# Altium PCB turkin_ivt23_1d_PCB1.PcbDoc
Units mm, origin at the board's own origin, x right, y up, seen from the top; angles counter-clockwise.
Board outline 135.5 x 62 mm, 2 copper layers (Top Layer, Bottom Layer), stack 1.535 mm thick; 50 components, 66 nets, 239 pads, 0 vias.
Unrouted connection lines stored in the file: 158.
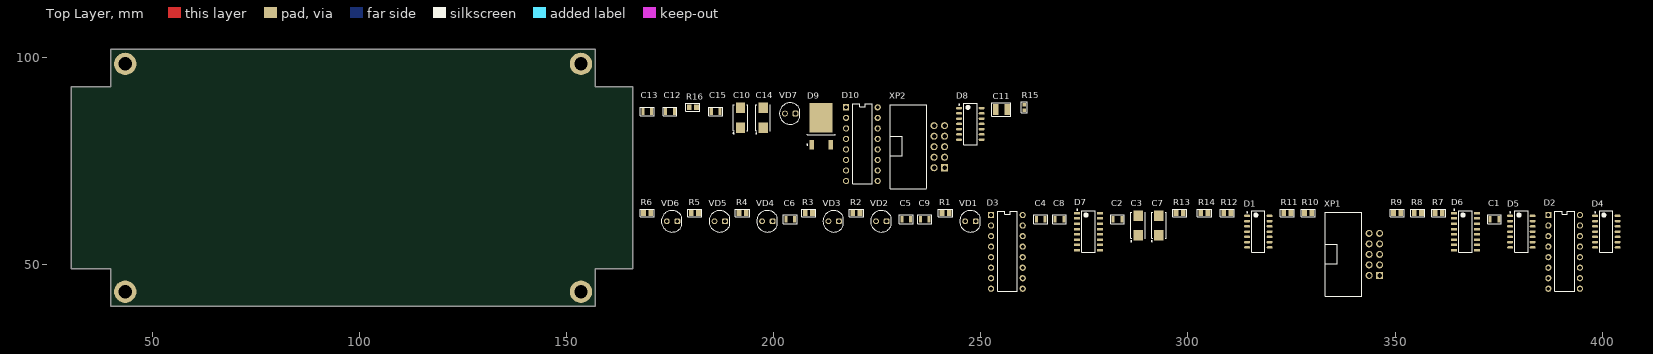
[diagram p0: Top Layer view]
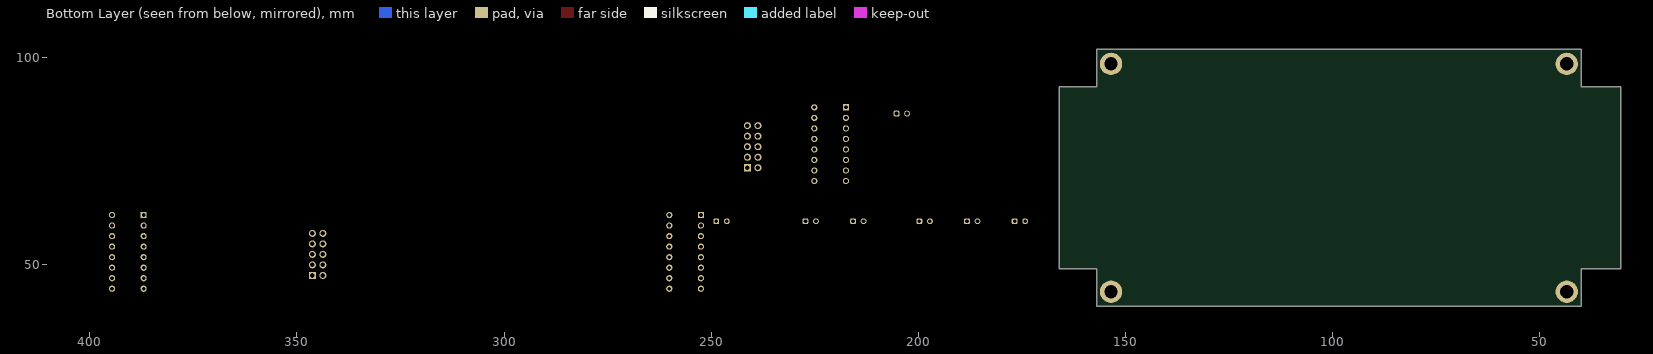
[diagram p1: Bottom Layer view, seen from below]

## Layer stack, top to bottom
Top Solder: solder mask 0.01, Solder Resist, Dk 3.5
Top Layer: signal copper 0.018
Dielectric 1: core 1.4986, Core-043, Dk 4.3
Bottom Layer: signal copper 0.018
Bottom Solder: solder mask 0.01, Solder Resist, Dk 3.5

## Board outline
30.5,49 40,49 40,40 157,40 157,49 166,49 166,93 157,93 157,102 40,102 40,93 30.5,93

## Design rules (kind name [scope] priority, off if disabled: settings)
Clearance [All] p1: gap=0.2 ignorepadtopadclearanceinfootprint=FALSE
DiffPairsRouting [All] p1: maxlimit=0.77 minlimit=0.2 mostfreqgap=0.35 toplayer_minwidth=0.2 toplayer_maxwidth=0.5 toplayer_prefwidth=0.38 bottomlayer_minwidth=0.2 bottomlayer_maxwidth=0.5 bottomlayer_prefwidth=0.38 maxuncoupledlength=12.7
HoleSize [All] p1: absolutevalues=TRUE maxlimit=4.5 minlimit=0.3 maxpercent=80.000 minpercent=20.000
PolygonConnect [All] p1: connectstyle=Relief reliefconductorwidth=0.254 reliefentries=4 polygonreliefangle="90 Angle" airgapwidth=0.254
RoutingVias [All] p1: holewidth=0.4 width=0.8 viastyle="Through Hole" minholewidth=0.3 minwidth=0.6 maxholewidth=1 maxwidth=1.5
SolderMaskExpansion [All] p1: expansion=0.102 istentingtop=FALSE
Width [All] p1: maxlimit=0.5 minlimit=0.2 preferedwidth=0.38 minimp=50.000000 maximp=50.000000 favimp=50.000000
28 further rules are at their usual default settings.

## Classes and differential pairs
net class S[0..5]: S0 S1 S2 S3 S4 S5
component class turkin_ivt23_1d_list2: C10 C11 C12 C13 C14 C15 D8 D9 D10 R15 R16 VD1 VD7 XP2
component class turkin_ivt23_1d_list1: C1 C2 C3 C4 C5 C6 C7 C8 C9 D1 D2 D3 D4 D5 D6 D7 R1 R2 R3 R4 R5 R6 R7 R8 R9 R10 R11 R12 R13 R14 VD1 VD2 VD3 VD4 VD5 VD6 XP1

## Components (designator, comment, footprint, x,y, rotation, side; value= is the part's Value field where it differs from the comment)
C1 "" 0805_N 373.999,61 r0 top value=0.1мкФ
C2 "" 0805_N 282.999,61 r0 top value=0.1мкФ
C3 "C" C-Tantal 287.999,59.5 r90 top value=10мкФ
C4 "" 0805_N 264.499,61 r0 top value=0.1мкФ
C5 "" 0805_N 232,61 r0 top value=0.1мкФ
C6 "" 0805_N 204,61 r0 top value=0.1мкФ
C7 "C" C-Tantal 292.999,59.5 r90 top value=10мкФ
C8 "" 0805_N 268.999,61 r0 top value=0.1мкФ
C9 "" 0805_N 236.5,61 r0 top value=0.1мкФ
C10 "C" C-Tantal 192,85.5 r90 top value=10мкФ
C11 "1210" K10-79_3.2_2.5(1210) 254.999,87.5 r0 top
C12 "" 0805_N 175,87 r0 top value=0.1мкФ
C13 "" 0805_N 169.5,87 r0 top value=0.1мкФ
C14 "C" C-Tantal 197.5,85.5 r90 top value=10мкФ
C15 "" 0805_N 186,87 r0 top value=0.1мкФ
D1 "74AC00SC" SO14-N 316.999,58 r0 top
D2 "DIP-16" DIP16 386.999,62 r0 top
D3 "DIP-16" DIP16 252.499,62 r0 top
D4 "74AC00SC" SO14-N 400.999,58 r0 top
D5 "74AC00SC" SO14-N 380.499,58 r0 top
D6 "SOIC-16" SO16-N 366.999,58 r0 top
D7 "SOIC-16" SO16-N 275.999,58 r0 top
D8 "74AC00SC" SO14-N 247.5,84 r0 top
D9 "LM1117DTX-5.0/NOPB" TO-252 211.5,83.5 r90 top
D10 "MC14520BCP \"Motorola\"" DIP16 217.5,88 r0 top
R1 "0805" RES_0805_2012_N 241.5,62.5 r0 top value=270Ом
R2 "0805" RES_0805_2012_N 220,62.5 r0 top value=270Ом
R3 "0805" RES_0805_2012_N 208.5,62.5 r0 top value=270Ом
R4 "0805" RES_0805_2012_N 192.5,62.5 r0 top value=270Ом
R5 "0805" RES_0805_2012_N 181,62.5 r0 top value=270Ом
R6 "0805" RES_0805_2012_N 169.5,62.5 r0 top value=270Ом
R7 "0805" RES_0805_2012_N 360.499,62.5 r0 top value=270Ом
R8 "0805" RES_0805_2012_N 355.499,62.5 r0 top value=270Ом
R9 "0805" RES_0805_2012_N 350.499,62.5 r0 top value=270Ом
R10 "0805" RES_0805_2012_N 328.999,62.5 r0 top value=270Ом
R11 "0805" RES_0805_2012_N 323.999,62.5 r0 top value=270Ом
R12 "0805" RES_0805_2012_N 309.499,62.5 r0 top value=270Ом
R13 "0805" RES_0805_2012_N 297.999,62.5 r0 top value=270Ом
R14 "0805" RES_0805_2012_N 303.999,62.5 r0 top value=270Ом
R15 "Р1-12-0,1 * 5%-M-\"A\" АЛЯР.434110.005 ТУ" RES_0603_1608_N 260.499,88 r90 top value=5.1КОм
R16 "0805" RES_0805_2012_N 180.5,88 r0 top value=270Ом
VD1 "521-9466" 521-9466 247.5,60.5 r0 top
VD2 "521-9466" 521-9466 226,60.5 r0 top
VD3 "521-9466" 521-9466 214.5,60.5 r0 top
VD4 "521-9466" 521-9466 198.5,60.5 r0 top
VD5 "521-9466" 521-9466 187,60.5 r0 top
VD6 "521-9466" 521-9466 175.5,60.5 r0 top
VD7 "521-9466" 521-9466 204,86.5 r0 top
XP1 "TE_1-1634689-0" BH-10R 344.999,52.5 r0 top
XP2 "TE_1-1634689-0" BH-10R 240,78.5 r0 top

## Footprints (in the part's own frame and the unit in brackets; to place one, negate y for a bottom-side part, rotate by r counter-clockwise, add the part's x,y. Pads: shape width x height; smd on the part's side, far side on the other; paste and mask are expansions set on the pad)
521-9466 [mm]
  round 1.4 hole 0.9: A(-1.27,0)
  rrect50% 1.4x1.4 hole 0.9: C(1.27,0)
  silkscreen extent -2.59,-2.59 2.37,2.59, body extent -2.92,-2.92 2.41,2.92, height 10.71
0805_N [mm] "Резистор, конденсатор"
  rect 0.75x1.6 smd: 1(-1.05,0) 2(1.05,0)
  silkscreen extent -1.68,-1.05 1.68,1.05, body extent -1.05,-0.58 1.05,0.58, height 1
BH-10R [mm] "Разъем угловой 2х5х2,54 типа ВН"
  rect 1.7x1.7 hole 1.1: 1(1.27,-5.08)
  round 1.7 hole 1.1: 2(-1.27,-5.08) 3(1.27,-2.54) 4(-1.27,-2.54) 5(1.27,0) 6(-1.27,0) 7(1.27,2.54) 8(-1.27,2.54) 9(1.27,5.08) 10(-1.27,5.08)
  silkscreen extent -11.8,-10.1 -3.05,10.15, body extent -11.85,-10.2 1.65,10.15, height 9.13
C-Tantal [mm]
  rect 2.55x2.25 smd: +(-2.375,0) -(2.375,0)
  silkscreen extent -3.92,-1.75 3.15,1.8, body extent -3.37,-1.75 3.37,1.75, height 2.81
DIP16 [mm]
  rect 1.5x1.5 hole 0.9: 1(0,0)
  round 1.5 hole 0.9: 2(0,-2.54) 3(0,-5.08) 4(0,-7.62) 5(0,-10.16) 6(0,-12.7) 7(0,-15.24) 8(0,-17.78) 9(7.62,-17.78) 10(7.62,-15.24) 11(7.62,-12.7) 12(7.62,-10.16) 13(7.62,-7.62) 14(7.62,-5.08) 15(7.62,-2.54) 16(7.62,0)
  silkscreen extent 1.58,-18.41 6.35,0.89, body extent -0.25,-18.54 7.95,0.76, height 5.08
K10-79_3.2_2.5(1210) [mm]
  rect 1.3x2.7 smd: 1(-1.4,0) 2(1.4,0)
  silkscreen extent -2.3,-1.6 2.3,1.6, body extent -1.65,-1.3 1.65,1.3, height 1.75
RES_0603_1608_N [mm] "Chip Resistor, 2-Leads, Body 1,60x0,80mm, IPC Medium Density"
  rect 0.85x0.9 smd: 1(-0.65,0) 2(0.65,0)
  silkscreen extent -1.33,-0.7 1.33,0.7, body extent -0.87,-0.45 0.87,0.45, height 0.55
RES_0805_2012_N [mm] "Rezistor 0805"
  rect 1.15x1.4 smd: 1(-0.875,0) 2(0.875,0)
  silkscreen extent -1.7,-0.95 1.7,0.95, body extent -1.1,-0.7 1.1,0.7, height 0.6
SO14-N [mm]
  oval 1.45x0.6 smd: 1(-2.725,3.81) 2(-2.725,2.54) 3(-2.725,1.27) 4(-2.725,0) 5(-2.725,-1.27) 6(-2.725,-2.54) 7(-2.725,-3.81) 8(2.725,-3.81) 9(2.725,-2.54) 10(2.725,-1.27) 11(2.725,0) 12(2.725,1.27) 13(2.725,2.54) 14(2.725,3.81)
  silkscreen extent -2.85,-5 1.6,5, body extent -3,-5 3,5, height 1.45
SO16-N [mm] "SOIC, 16-Leads, Body 9,90x3,90mm, Pitch 1,27mm, IPC Medium Density"
  rect 1.45x0.6 smd: 1(-2.725,4.445) 2(-2.725,3.175) 3(-2.725,1.905) 4(-2.725,0.635) 5(-2.725,-0.635) 6(-2.725,-1.905) 7(-2.725,-3.175) 8(-2.725,-4.445) 9(2.725,-4.445) 10(2.725,-3.175) 11(2.725,-1.905) 12(2.725,-0.635) 13(2.725,0.635) 14(2.725,1.905) 15(2.725,3.175) 16(2.725,4.445)
  silkscreen extent -2.85,-5 1.6,5.42, body extent -3,-5 3,5, height 1.45
TO-252 [mm] "D-PAK, 3-Pads, Body 6,21x6,73mm (max), IPC Medium Density"
  rect 2.25x1 smd: 1(-4.5,2.29) 3(-4.5,-2.29)
  rect 7.2x5.55 smd: 4(2,0)
  silkscreen extent -4.62,-3.35 -2,3.46, body extent -4.35,-3.37 5.56,3.37, height 3.15

## Part data
C1 C2 C4 C5 C6 C8 C9 C12 C13 C15: library part К10-79_0805_Н90, "Чип конденсатор 0805 Н90 ряд Е6", Case=0805, Manufacturer="ООО \"Кулон\"", Tolerance=+80%-20%, Voltage=25В, BOM="К10-79-25В-B-*+80%-20%-Н90 АЖЯР.673511.004 ТУ", Created_by=Желобаев, Issue_date=19_12_2018, Name=К10-79, Name2="Конденсатор К10-79", TKE=Н90, TU="АЖЯР.673511.004 ТУ", Type=K10-79, Version=0, Weight=0.05
C3 C7 C10 C14: library part K53-65_C_10%, "К53-65 Конденсатор танталовый C(6032) 0,47-100 мкФ", Manufacturer="ОАО \"Элеконд\"", Tolerance=10%, Voltage=16В, BOM="К53-65 \"C\" - 16ВB - 10мкФмкФ ±10% АЖЯР.673546.004 ТУ", Case=C, Created_by=Желобаев, Issue_date=6.01.2019, Name=К53-65, Name2="Конденсатор К53-65", Size=C, TU="АЖЯР.673546.004 ТУ", Version=0, Weight=0,3
C11: library part К10-79_1210_Н30, "Чип конденсатор 1210 Н30 ряд Е6", Manufacturer="ООО \"Кулон\"", Tolerance=±20%, Value_KD=0.22мкФ, Voltage=10В, BOM="Конденсатор К10-79-10В-B-0.22мкФ±20%-Н30 АЖЯР.673511.004 ТУ", Datum=19_12_2018, HelpURL=\\papa\Info\Altium_Library\Даташиты_и_ТУ\Конденсаторы_отечественные\К10-79_АЖЯР_673511_004ТУ.pdf, Hight=1.75, LibraryEngeneer=Желобаев, LiveStatus=производится, Name="Конденсатор К10-79", Packing=катушка, Permit MPSU=разрешен, Reliability=0.000005, Size=1210, TKE=Н30, TU="АЖЯР.673511.004 ТУ", Type=K10-79, Version=00, Weight=0.2
D1 D4 D5 D8: "4 элемента 2И-НЕ TTL SOIC-14", Case=SOIC-14, Manufacturer="ON Semiconductor", Power_Voltage="4.5 - 5.5 V", BOM="74AC00SC \"ON Semiconductor\"", Created_by=Желобаев, Issue_date=10.04.2019, Name=74AC00SC, Name2="Микросхема 74AC00SC", Version=0
D2 D3: library part HCF4017BEY, "Декадный счетчик c 10 декодированными выходами", Manufacturer=STMicroelectronics, Power_Voltage="-0.5 -22 V", BOM="HCF4017BEY \"STMicroelectronics\"", Case=DIP-16, Created_by=Желобаев, Issue_date=05.04.2019, Name=HCF4017BEY, Name2="Микросхема HCF4017BEY", Version=0
D6 D7: library part 74HC151D, "мультиплексор 8 канальный CMOS", Manufacturer="NXP Semiconductors", Power_Voltage="2.0 -6.0 V", BOM="74HC151D \"NXP Semiconductors\"", Case=SOIC-16, Created_by=Желобаев, Issue_date=05.04.2019, Name=74HC151D, Name2="Микросхема 74HC151D", Version=0
D10: library part MC14520BCP, "Два двоичных счетчика", Case=DIP-16, Manufacturer=Motorola, BOM="MC14520BCP \"Motorola\"", Created_by=Желобаев, Issue_date=6.01.2019, Name=MC14520BCP, Name2="Микросхема MC14520BCP", Version=0
R1 R2 R3 R4 R5 R6 R7 R8 R9 R10 R11 R12 R13 R14 R16: library part Р1-12-0,125-5%, "Резистор от 0,75 Ом до 2 МОм", Manufacturer="ОАО \"НПО \"Эркон\"", Tolerance=5%, Voltage=150, BOM="Р1-12-0,125 * 5%-M-\"A\" АЛЯР.434110.005 ТУ", Case=0805, Created_by=Желобаев, Issue_date=05_12_2018, Name=Р1-12-0,125, Name2="Резистор Р1-12-0,125", Size=0805, TKR=M, TU="АЛЯР.434110.005 ТУ", Type="Р1-12-0,125±5%-М-\"А\"", Version=00, Weight=0,01
R15: library part Р1-12-0,1-5%, "Резистор от 0,75 Ом до 10 МОм", Case=0603, Manufacturer="ОАО \"НПО \"Эркон\"", Tolerance=5%, Voltage=50, BOM="Р1-12-0,1 * 5%-M-\"A\" АЛЯР.434110.005 ТУ", Created_by=Желобаев, Issue_date=10.04.2019, Name=Р1-12-0,1, Name2="Резистор Р1-12-0,1", Size=0603, TKR=M, TU="АЛЯР.434110.005 ТУ", Type="Р1-12-0,1±5%-М-\"А\"", Version=00, Weight=0,005
VD1 VD2 VD3 VD4 VD5 VD6 VD7: "Светодиод 5мм желтый", BOM="521-9466 Dialight"
XP1 XP2: "Вилка типа BH-10R угловая правая двухрядная 2х5х2.54", Case=BH-10R, Manufacturer="TE Connectivity", BOM="TE_1-1634689-0 \"TE Connectivity\"", Created_by=Желобаев, Issue_date=13.05.2019, Name=TE_1-1634689-0, Name2="Вилка угловая TE_1-1634689-0", Version=0

## Free pads (board coordinates)
  round 5.4 hole 3.2: 3(153.5,98.5) 4(153.5,43.5) 5(43.5,43.5) 6(43.5,98.5)

## Nets (pads, with @x,y where several pads share a name; then routed paths per layer and width w, separated by ;. In a path a pad name is that pad's centre, name@x,y a point inside that pad or via, vN(x,y) a via of type N, cw(c..) or ccw(c..) an arc to the next point about the centre after c; other vN are vias at no path point)
+5V: C1.2 C2.2 C3.+ C4.1 C5.1 C6.1 C7.+ C8.2 C9.2 C12.2 C13.2 C14.+ C15.1 D1.14 D2.16 D3.16 D4.14 D5.14 D6.16 D7.16 D8.14 D9.4 D10.2 D10.10 D10.16 VD7.A
ABC0: D4.3 D6.4 R7.1
ABC1: D1.6 D6.3 R8.1
ABC2: D4.8 D6.2 R9.1
ABC3: D5.11 D6.1 R10.1
ABC4: D5.3 D5.13 D6.15 R11.1
ABC5: D4.6 D6.14 R12.1
ABC6: D4.5 D4.11 D6.13 R13.1
ABC7: D1.8 D6.12 R14.1
GND: C1.1 C2.1 C3.- C4.2 C5.2 C6.2 C7.- C8.1 C9.1 C12.1 C13.1 D1.7 D2.8 D2.13 D3.8 D3.13 D4.7 D5.7 D6.8 D7.8 D8.7 D9.1 D10.8 R16.1 VD1.C VD2.C VD3.C VD4.C VD5.C VD6.C XP1.3 XP1.4 XP1.5 XP1.6 XP1.7 XP1.8 XP2.9 XP2.10
NetC10_+: C10.+ D9.3 XP2.7
NetC10_-: C10.- C14.- C15.2
NetC11_1: C11.1 D8.1 R15.1
NetC11_2: C11.2 D8.6 D8.12 D8.13
NetD1_1: D1.1 D2.12
NetD1_2: D1.2 D5.5 D5.9 XP2.3
NetD1_3: D1.3 D1.4 D1.10 D4.2 D4.9 D4.13 D5.2
NetD1_11: D1.11 D3.14
NetD1_12: D1.12 D1.13 D5.4 D5.10 D10.14
NetD2_14: D2.14 D8.8 D10.1
NetD3_3: D3.3 R1.1
NetD3_4: D3.4 R2.1
NetD3_5: D3.5 R4.1
NetD3_9: D3.9 R5.1
NetD3_10: D3.10 R3.1
NetD3_12: D3.12 R6.1
NetD5_6: D5.6 D7.7
NetD5_8: D5.8 D6.7
NetD7_1: D7.1 R10.2
NetD7_2: D7.2 R9.2
NetD7_3: D7.3 R8.2
NetD7_4: D7.4 R7.2
NetD7_12: D7.12 R14.2
NetD7_13: D7.13 R13.2
NetD7_14: D7.14 R12.2
NetD7_15: D7.15 R11.2
NetD8_2: D8.2 XP2.1
NetD8_3: D8.3 D8.4 D8.5
NetD8_9: D8.9 D8.10 D8.11 R15.2
NetD10_6: D10.6 D10.9
NetR1_2: R1.2 VD1.A
NetR2_2: R2.2 VD2.A
NetR3_2: R3.2 VD3.A
NetR4_2: R4.2 VD4.A
NetR5_2: R5.2 VD5.A
NetR6_2: R6.2 VD6.A
NetR16_2: R16.2 VD7.C
Out1_N: D6.6 XP1.2
Out1_P: D6.5 XP1.1
Out2_N: D7.6 XP1.10
Out2_P: D7.5 XP1.9
Reset: D2.15 D3.15 D10.7 D10.15 XP2.2
S0: D6.11 D10.3
S1: D6.10 D10.4
S2: D6.9 D10.5
S3: D7.11 D10.11
S4: D7.10 D10.12
S5: D7.9 D10.13
STROB0: D2.3 D4.1
STROB1: D1.5 D2.2
STROB2: D2.4 D4.10
STROB3: D2.7 D5.12
STROB4: D2.10 D5.1
STROB5: D2.1 D4.4
STROB6: D2.5 D4.12
STROB7: D1.9 D2.6
pads on no net: D2.9 D2.11 D3.1 D3.2 D3.6 D3.7 D3.11 XP2.4 XP2.5 XP2.6 XP2.8

## Silkscreen, mask and mechanical layers (free items; w line width, h text height)
Board:
  the board outline again, w0.254